# EAGLE board Glasses (EAGLE 7.7.0), part 1 of 2
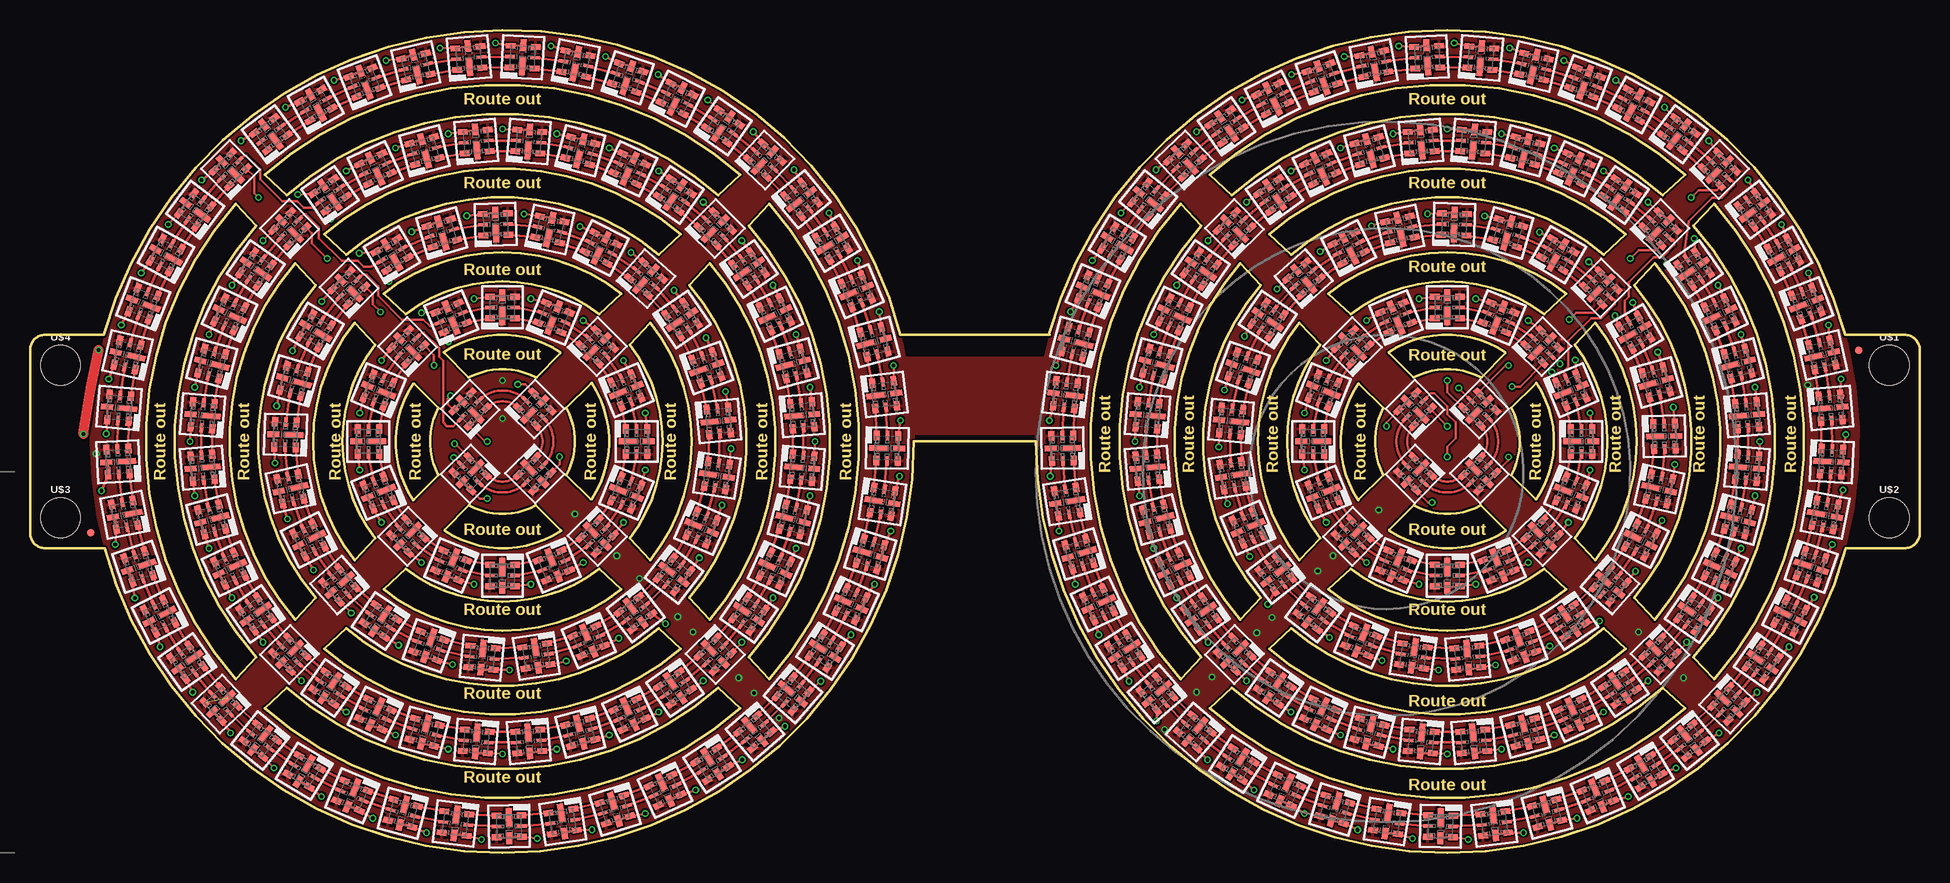
[diagram p0: board, top side]
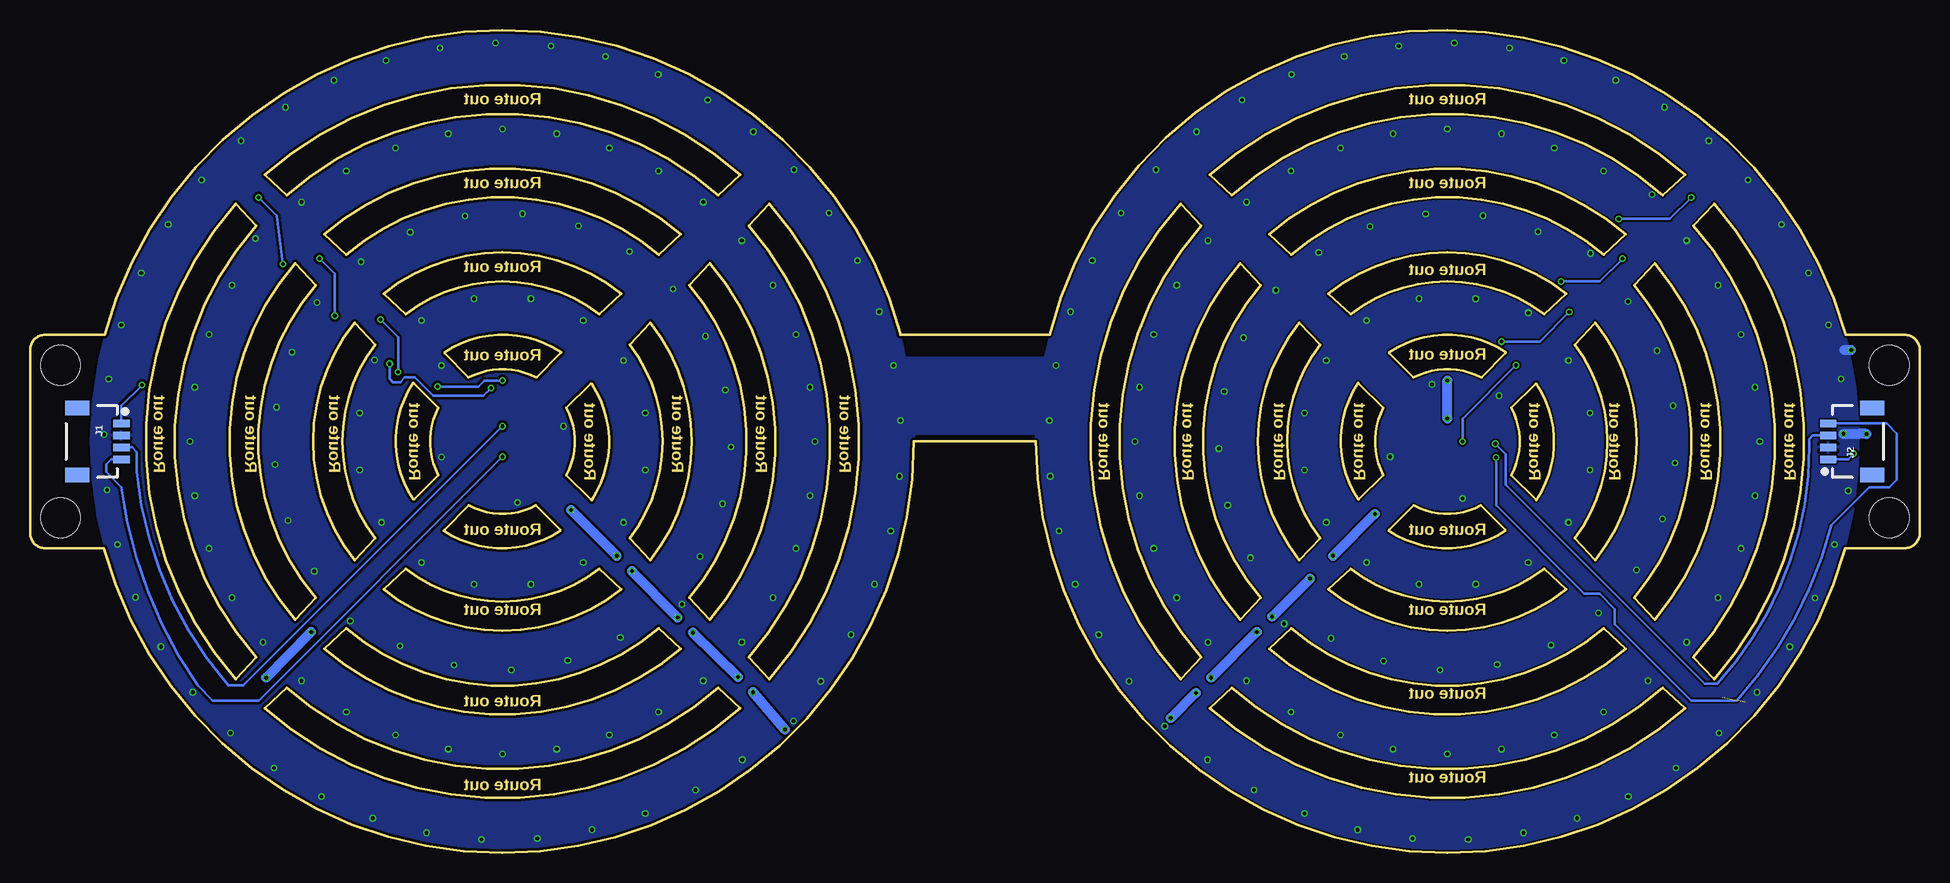
[diagram p1: board, bottom side, seen from below]

Size 157.48 x 68.58 mm. Coordinates in mm from the lower left corner, seen from the top.
Outline: 46.74,39.12 44.7,37.08 arc-56 44.7,31.5 46.74,29.46
Outline: 44.2,41.66 42.23,39.62 42.16,39.62 arc56 36.58,39.62 36.51,39.62 34.54,41.66
Outline: 44.2,26.92 42.16,28.96 arc-56 36.58,28.96 34.54,26.92
Outline: 34.48,41.72 arc-67 44.2,41.72
Outline: 31.94,29.4 arc-67 31.94,39.12
Outline: 44.26,26.86 arc-67 34.54,26.86
Outline: 46.8,39.18 arc-67 46.8,29.46
Outline: 32,29.46 34.04,31.5 arc-56 34.04,37.08 32,39.12
Outline: 125.48,39.12 123.44,37.08 arc-56 123.44,31.5 125.48,29.46
Outline: 122.94,41.66 120.97,39.62 120.9,39.62 arc56 115.32,39.62 115.25,39.62 113.28,41.66
Outline: 122.94,26.92 120.9,28.96 arc-56 115.32,28.96 113.28,26.92
Outline: 113.22,41.72 arc-67 122.94,41.72
Outline: 110.68,29.4 arc-67 110.68,39.12
Outline: 123,26.86 arc-67 113.28,26.86
Outline: 125.54,39.18 arc-67 125.54,29.46
Outline: 110.74,29.46 112.78,31.5 arc-56 112.78,37.08 110.74,39.12
Outline: 84.9,43.18 72.52,43.18 arc77 39.37,68.58 arc74 6.16,43.18 1.27,43.18 arc90 0,41.91 0,26.67 arc90 1.27,25.4 6.22,25.4 arc75 39.37,0 arc90 73.66,34.29 83.82,34.29 arc90 118.11,0 arc75 151.32,25.4 156.21,25.4 arc90 157.48,26.67 157.48,41.91 arc90 156.21,43.18 151.26,43.18 arc75 118.11,68.58 arc75 84.9,43.18
Outline: 84.9,43.18 84.96,43.18
Outline: 47.43,44.9 49.28,46.61 arc77 29.46,46.61 31.31,44.9 arc-75 47.43,44.9
Outline: 49.98,42.35 51.69,44.2 arc-77 51.69,24.38 49.98,26.23 arc75 49.98,42.35
Outline: 47.43,23.69 49.28,21.97 arc-77 29.46,21.97 31.31,23.69 arc75 47.43,23.69
Outline: 28.77,26.23 27.05,24.38 arc-77 27.05,44.2 28.77,42.35 arc75 28.77,26.23
Outline: 52.39,49.85 54.23,51.56 arc81 24.51,51.56 26.35,49.85 arc-81 52.39,49.85
Outline: 54.93,47.31 56.64,49.15 arc-81 56.64,19.43 54.93,21.27 arc81 54.93,47.31
Outline: 57.34,54.8 59.18,56.52 arc83 19.56,56.52 21.4,54.8 arc-83 57.34,54.8
Outline: 59.88,52.26 61.59,54.1 arc-83 61.59,14.48 59.88,16.32 arc83 59.88,52.26
Outline: 23.81,47.31 22.1,49.15 arc81 22.1,19.43 23.81,21.27 arc-81 23.81,47.31
Outline: 26.35,18.73 24.51,17.02 arc81 54.23,17.02 52.39,18.73 arc-81 26.35,18.73
Outline: 18.86,52.26 17.14,54.1 arc83 17.14,14.48 18.86,16.32 arc-83 18.86,52.26
Outline: 21.4,13.78 19.56,12.06 arc83 59.18,12.06 57.34,13.78 arc-83 21.4,13.78
Outline: 126.17,44.9 128.02,46.61 arc77 108.2,46.61 110.05,44.9 arc-75 126.17,44.9
Outline: 128.72,42.35 130.43,44.2 arc-77 130.43,24.38 128.72,26.23 arc75 128.72,42.35
Outline: 126.17,23.69 128.02,21.97 arc-77 108.2,21.97 110.05,23.69 arc75 126.17,23.69
Outline: 107.5,26.23 105.79,24.38 arc-77 105.79,44.2 107.5,42.35 arc75 107.5,26.23
Outline: 131.13,49.85 132.97,51.56 arc81 103.25,51.56 105.09,49.85 arc-81 131.13,49.85
Outline: 133.67,47.31 135.38,49.15 arc-81 135.38,19.43 133.67,21.27 arc81 133.67,47.31
Outline: 136.08,54.8 137.92,56.52 arc83 98.3,56.52 100.14,54.8 arc-83 136.08,54.8
Outline: 138.62,52.26 140.34,54.1 arc-83 140.34,14.48 138.62,16.32 arc83 138.62,52.26
Outline: 102.55,47.31 100.84,49.15 arc81 100.84,19.43 102.55,21.27 arc-81 102.55,47.31
Outline: 105.09,18.73 103.25,17.02 arc81 132.97,17.02 131.13,18.73 arc-81 105.09,18.73
Outline: 97.6,52.26 95.89,54.1 arc83 95.89,14.48 97.6,16.32 arc-83 97.6,52.26
Outline: 100.14,13.78 98.3,12.06 arc83 137.92,12.06 136.08,13.78 arc-83 100.14,13.78
Copper layers (1*16): Top 0.035mm / dielectric 1.5mm / Bottom 0.035mm
Design rules "SparkFun-2-layer-FAB-LIMIT": minimum track width 4mil, minimum drill 6mil, track to track 4mil, track to pad 4mil, pad to pad 4mil, via to via 4mil, smd to smd 4mil, copper to edge 4mil, drill to drill 4mil, minimum pad ring 5mil, minimum via ring 5mil, stop-mask expansion 4mil, vias tented up to drill 25mil, thermal gap 10mil

## Footprints (pad centres in the part's own frame; a part is rotated, then mirrored left to right if it is on the bottom)
FIDUCIAL-MICRO = smd 0.635 x 0.635: 1 0,0
1X04_1MM_RA = smd 0.6 x 1.35: 1 -1.5,0; 2 -0.5,0; 3 0.5,0; 4 1.5,0 | smd 1.2 x 2: NC1 2.8,-3.675; NC2 -2.8,-3.675
APA102-2020 = smd 0.8 x 0.3: CKI 1.05,0; CKO -1.05,0 | smd 0.8 x 0.5: GND 1.05,0.9; SDI 1.05,-0.9; SDO -1.05,-0.9; VDD -1.05,0.9 | smd 0.5 x 1.5: GNDPAD 0,-0.75 | smd 0.5 x 1: VDDPAD 0,1
STAND-OFF = hole 3.302: 0,0

## Placement (x,y rotation side)
FD1  FIDUCIALUFIDUCIAL  [FIDUCIAL-MICRO]  152.4,41.91 0 top
FD2  FIDUCIALUFIDUCIAL  [FIDUCIAL-MICRO]  5.08,26.67 0 top
J1  [1X04_1MM_RA]  149.86,34.29 270 bottom
J2  [1X04_1MM_RA]  7.62,34.29 90 bottom
U1  APA1022020  [APA102-2020]  36.68,31.6 135 top
U2  APA1022020  [APA102-2020]  42.06,31.6 225 top
U3  APA1022020  [APA102-2020]  42.06,36.98 315 top
U4  APA1022020  [APA102-2020]  36.68,36.98 45 top
U5  APA1022020  [APA102-2020]  31.47,42.19 45 top
U6  APA1022020  [APA102-2020]  29.04,38.57 67.5 top
U7  APA1022020  [APA102-2020]  28.19,34.29 90 top
U8  APA1022020  [APA102-2020]  29.04,30.01 112.5 top
U9  APA1022020  [APA102-2020]  31.47,26.39 135 top
U10  APA1022020  [APA102-2020]  35.09,23.96 157.5 top
U11  APA1022020  [APA102-2020]  39.37,23.11 180 top
U12  APA1022020  [APA102-2020]  43.65,23.96 202.5 top
U13  APA1022020  [APA102-2020]  47.27,26.39 225 top
U14  APA1022020  [APA102-2020]  49.7,30.01 247.5 top
U15  APA1022020  [APA102-2020]  50.55,34.29 270 top
U16  APA1022020  [APA102-2020]  49.7,38.57 292.5 top
U17  APA1022020  [APA102-2020]  47.27,42.19 315 top
U18  APA1022020  [APA102-2020]  43.65,44.62 337.5 top
U19  APA1022020  [APA102-2020]  39.37,45.47 0 top
U20  APA1022020  [APA102-2020]  35.09,44.62 22.5 top
U21  APA1022020  [APA102-2020]  26.57,47.09 45 top
U22  APA1022020  [APA102-2020]  23.79,43.5 59.4 top
U23  APA1022020  [APA102-2020]  21.99,39.34 73.8 top
U24  APA1022020  [APA102-2020]  21.28,34.86 88.2 top
U25  APA1022020  [APA102-2020]  21.71,30.34 102.6 top
U26  APA1022020  [APA102-2020]  23.25,26.07 117 top
U27  APA1022020  [APA102-2020]  25.79,22.32 131.4 top
U28  APA1022020  [APA102-2020]  29.2,19.32 145.8 top
U29  APA1022020  [APA102-2020]  33.24,17.26 160.2 top
U30  APA1022020  [APA102-2020]  37.67,16.27 174.6 top
U31  APA1022020  [APA102-2020]  42.2,16.42 189 top
U32  APA1022020  [APA102-2020]  46.56,17.68 203.4 top
U33  APA1022020  [APA102-2020]  50.46,19.99 217.8 top
U34  APA1022020  [APA102-2020]  53.67,23.2 232.2 top
U35  APA1022020  [APA102-2020]  55.98,27.1 246.6 top
U36  APA1022020  [APA102-2020]  57.24,31.46 261 top
U37  APA1022020  [APA102-2020]  57.39,35.99 275.4 top
U38  APA1022020  [APA102-2020]  56.4,40.42 289.8 top
U39  APA1022020  [APA102-2020]  54.34,44.46 304.2 top
U40  APA1022020  [APA102-2020]  51.34,47.87 318.6 top
U41  APA1022020  [APA102-2020]  47.59,50.41 333 top
U42  APA1022020  [APA102-2020]  43.32,51.95 347.4 top
U43  APA1022020  [APA102-2020]  38.8,52.38 1.8 top
U44  APA1022020  [APA102-2020]  34.32,51.67 16.2 top
U45  APA1022020  [APA102-2020]  30.16,49.87 30.6 top
U46  APA1022020  [APA102-2020]  21.63,52.03 45 top
U47  APA1022020  [APA102-2020]  18.82,48.68 55 top
U48  APA1022020  [APA102-2020]  16.64,44.89 65 top
U49  APA1022020  [APA102-2020]  15.14,40.78 75 top
U50  APA1022020  [APA102-2020]  14.38,36.48 85 top
U51  APA1022020  [APA102-2020]  14.38,32.1 95 top
U52  APA1022020  [APA102-2020]  15.14,27.8 105 top
U53  APA1022020  [APA102-2020]  16.64,23.69 115 top
U54  APA1022020  [APA102-2020]  18.82,19.9 125 top
U55  APA1022020  [APA102-2020]  21.63,16.55 135 top
U56  APA1022020  [APA102-2020]  24.98,13.74 145 top
U57  APA1022020  [APA102-2020]  28.77,11.56 155 top
U58  APA1022020  [APA102-2020]  32.88,10.06 165 top
U59  APA1022020  [APA102-2020]  37.18,9.3 175 top
U60  APA1022020  [APA102-2020]  41.56,9.3 185 top
U61  APA1022020  [APA102-2020]  45.86,10.06 195 top
U62  APA1022020  [APA102-2020]  49.97,11.56 205 top
U63  APA1022020  [APA102-2020]  53.76,13.74 215 top
U64  APA1022020  [APA102-2020]  57.11,16.55 225 top
U65  APA1022020  [APA102-2020]  59.92,19.9 235 top
U66  APA1022020  [APA102-2020]  62.1,23.69 245 top
U67  APA1022020  [APA102-2020]  63.6,27.8 255 top
U68  APA1022020  [APA102-2020]  64.36,32.1 265 top
U69  APA1022020  [APA102-2020]  64.36,36.48 275 top
U70  APA1022020  [APA102-2020]  63.6,40.78 285 top
U71  APA1022020  [APA102-2020]  62.1,44.89 295 top
U72  APA1022020  [APA102-2020]  59.92,48.68 305 top
U73  APA1022020  [APA102-2020]  57.11,52.03 315 top
U74  APA1022020  [APA102-2020]  53.76,54.84 325 top
U75  APA1022020  [APA102-2020]  49.97,57.02 335 top
U76  APA1022020  [APA102-2020]  45.86,58.52 345 top
U77  APA1022020  [APA102-2020]  41.56,59.28 355 top
U78  APA1022020  [APA102-2020]  37.18,59.28 5 top
U79  APA1022020  [APA102-2020]  32.88,58.52 15 top
U80  APA1022020  [APA102-2020]  28.77,57.02 25 top
U81  APA1022020  [APA102-2020]  24.98,54.84 35 top
U82  APA1022020  [APA102-2020]  16.69,56.97 45 top
U83  APA1022020  [APA102-2020]  13.76,53.59 53 top
U84  APA1022020  [APA102-2020]  11.32,49.84 61 top
U85  APA1022020  [APA102-2020]  9.43,45.78 69 top
U86  APA1022020  [APA102-2020]  8.12,41.5 77 top
U87  APA1022020  [APA102-2020]  7.42,37.08 85 top
U88  APA1022020  [APA102-2020]  7.35,32.61 93 top
U89  APA1022020  [APA102-2020]  7.89,28.17 101 top
U90  APA1022020  [APA102-2020]  9.05,23.85 109 top
U91  APA1022020  [APA102-2020]  10.8,19.73 117 top
U92  APA1022020  [APA102-2020]  13.1,15.9 125 top
U93  APA1022020  [APA102-2020]  15.92,12.42 133 top
U94  APA1022020  [APA102-2020]  19.19,9.37 141 top
U95  APA1022020  [APA102-2020]  22.85,6.8 149 top
U96  APA1022020  [APA102-2020]  26.84,4.77 157 top
U97  APA1022020  [APA102-2020]  31.07,3.32 165 top
U98  APA1022020  [APA102-2020]  35.46,2.46 173 top
U99  APA1022020  [APA102-2020]  39.93,2.23 181 top
U100  APA1022020  [APA102-2020]  44.39,2.62 189 top
U101  APA1022020  [APA102-2020]  48.75,3.62 197 top
U102  APA1022020  [APA102-2020]  52.92,5.23 205 top
U103  APA1022020  [APA102-2020]  56.84,7.4 213 top
U104  APA1022020  [APA102-2020]  60.41,10.09 221 top
U105  APA1022020  [APA102-2020]  63.57,13.25 229 top
U106  APA1022020  [APA102-2020]  66.26,16.82 237 top
U107  APA1022020  [APA102-2020]  68.43,20.74 245 top
U108  APA1022020  [APA102-2020]  70.04,24.91 253 top
U109  APA1022020  [APA102-2020]  71.04,29.27 261 top
U110  APA1022020  [APA102-2020]  71.43,33.73 269 top
U111  APA1022020  [APA102-2020]  71.2,38.2 277 top
U112  APA1022020  [APA102-2020]  70.34,42.59 285 top
U113  APA1022020  [APA102-2020]  68.89,46.82 293 top
U114  APA1022020  [APA102-2020]  66.86,50.81 301 top
U115  APA1022020  [APA102-2020]  64.29,54.47 309 top
U116  APA1022020  [APA102-2020]  61.24,57.74 317 top
U117  APA1022020  [APA102-2020]  57.76,60.56 325 top
U118  APA1022020  [APA102-2020]  53.93,62.86 333 top
U119  APA1022020  [APA102-2020]  49.81,64.61 341 top
U120  APA1022020  [APA102-2020]  45.49,65.77 349 top
U121  APA1022020  [APA102-2020]  41.05,66.31 357 top
U122  APA1022020  [APA102-2020]  36.58,66.24 5 top
U123  APA1022020  [APA102-2020]  32.16,65.54 13 top
U124  APA1022020  [APA102-2020]  27.88,64.23 21 top
U125  APA1022020  [APA102-2020]  23.82,62.34 29 top
U126  APA1022020  [APA102-2020]  20.07,59.9 37 top
U127  APA1022020  [APA102-2020]  115.42,36.98 45 top
U128  APA1022020  [APA102-2020]  115.42,31.6 135 top
U129  APA1022020  [APA102-2020]  120.8,31.6 225 top
U130  APA1022020  [APA102-2020]  120.8,36.98 315 top
U131  APA1022020  [APA102-2020]  126.01,42.19 315 top
U132  APA1022020  [APA102-2020]  122.39,44.62 337.5 top
U133  APA1022020  [APA102-2020]  118.11,45.47 0 top
U134  APA1022020  [APA102-2020]  113.83,44.62 22.5 top
U135  APA1022020  [APA102-2020]  110.21,42.19 45 top
U136  APA1022020  [APA102-2020]  107.78,38.57 67.5 top
U137  APA1022020  [APA102-2020]  106.93,34.29 90 top
U138  APA1022020  [APA102-2020]  107.78,30.01 112.5 top
U139  APA1022020  [APA102-2020]  110.21,26.39 135 top
U140  APA1022020  [APA102-2020]  113.83,23.96 157.5 top
U141  APA1022020  [APA102-2020]  118.11,23.11 180 top
U142  APA1022020  [APA102-2020]  122.39,23.96 202.5 top
U143  APA1022020  [APA102-2020]  126.01,26.39 225 top
U144  APA1022020  [APA102-2020]  128.44,30.01 247.5 top
U145  APA1022020  [APA102-2020]  129.29,34.29 270 top
U146  APA1022020  [APA102-2020]  128.44,38.57 292.5 top
U147  APA1022020  [APA102-2020]  130.91,47.09 315 top
U148  APA1022020  [APA102-2020]  127.32,49.87 329.4 top
U149  APA1022020  [APA102-2020]  123.16,51.67 343.8 top
U150  APA1022020  [APA102-2020]  118.68,52.38 358.2 top
U151  APA1022020  [APA102-2020]  114.16,51.95 12.6 top
U152  APA1022020  [APA102-2020]  109.89,50.41 27 top
U153  APA1022020  [APA102-2020]  106.14,47.87 41.4 top
U154  APA1022020  [APA102-2020]  103.14,44.46 55.8 top
U155  APA1022020  [APA102-2020]  101.08,40.42 70.2 top
U156  APA1022020  [APA102-2020]  100.09,35.99 84.6 top
U157  APA1022020  [APA102-2020]  100.24,31.46 99 top
U158  APA1022020  [APA102-2020]  101.5,27.1 113.4 top
U159  APA1022020  [APA102-2020]  103.81,23.2 127.8 top
U160  APA1022020  [APA102-2020]  107.02,19.99 142.2 top
U161  APA1022020  [APA102-2020]  110.92,17.68 156.6 top
U162  APA1022020  [APA102-2020]  115.28,16.42 171 top
U163  APA1022020  [APA102-2020]  119.81,16.27 185.4 top
U164  APA1022020  [APA102-2020]  124.24,17.26 199.8 top
U165  APA1022020  [APA102-2020]  128.28,19.32 214.2 top
U166  APA1022020  [APA102-2020]  131.69,22.32 228.6 top
U167  APA1022020  [APA102-2020]  134.23,26.07 243 top
U168  APA1022020  [APA102-2020]  135.77,30.34 257.4 top
U169  APA1022020  [APA102-2020]  136.2,34.73 271.4 top
U170  APA1022020  [APA102-2020]  135.52,39.22 285.8 top
U171  APA1022020  [APA102-2020]  133.75,43.39 300.2 top
U172  APA1022020  [APA102-2020]  135.85,52.03 315 top
U173  APA1022020  [APA102-2020]  132.5,54.84 325 top
U174  APA1022020  [APA102-2020]  128.71,57.02 335 top
U175  APA1022020  [APA102-2020]  124.6,58.52 345 top
U176  APA1022020  [APA102-2020]  120.3,59.28 355 top
U177  APA1022020  [APA102-2020]  115.92,59.28 5 top
U178  APA1022020  [APA102-2020]  111.62,58.52 15 top
U179  APA1022020  [APA102-2020]  107.51,57.02 25 top
U180  APA1022020  [APA102-2020]  103.72,54.84 35 top
U181  APA1022020  [APA102-2020]  100.37,52.03 45 top
U182  APA1022020  [APA102-2020]  97.56,48.68 55 top
U183  APA1022020  [APA102-2020]  95.38,44.89 65 top
U184  APA1022020  [APA102-2020]  93.88,40.78 75 top
U185  APA1022020  [APA102-2020]  93.12,36.48 85 top
U186  APA1022020  [APA102-2020]  93.12,32.1 95 top
U187  APA1022020  [APA102-2020]  93.88,27.8 105 top
U188  APA1022020  [APA102-2020]  95.38,23.69 115 top
U189  APA1022020  [APA102-2020]  97.56,19.9 125 top
U190  APA1022020  [APA102-2020]  100.37,16.55 135 top
U191  APA1022020  [APA102-2020]  103.72,13.74 145 top
U192  APA1022020  [APA102-2020]  107.51,11.56 155 top
U193  APA1022020  [APA102-2020]  111.62,10.06 165 top
U194  APA1022020  [APA102-2020]  115.92,9.3 175 top
U195  APA1022020  [APA102-2020]  120.3,9.3 185 top
U196  APA1022020  [APA102-2020]  124.6,10.06 195 top
U197  APA1022020  [APA102-2020]  128.71,11.56 205 top
U198  APA1022020  [APA102-2020]  132.5,13.74 215 top
U199  APA1022020  [APA102-2020]  135.85,16.55 225 top
U200  APA1022020  [APA102-2020]  138.66,19.9 235 top
U201  APA1022020  [APA102-2020]  140.84,23.69 245 top
U202  APA1022020  [APA102-2020]  142.34,27.8 255 top
U203  APA1022020  [APA102-2020]  143.1,32.1 265 top
U204  APA1022020  [APA102-2020]  143.1,36.48 275 top
U205  APA1022020  [APA102-2020]  142.34,40.78 285 top
U206  APA1022020  [APA102-2020]  140.84,44.89 295 top
U207  APA1022020  [APA102-2020]  138.66,48.68 305 top
U208  APA1022020  [APA102-2020]  140.79,56.97 315 top
U209  APA1022020  [APA102-2020]  137.41,59.9 323 top
U210  APA1022020  [APA102-2020]  133.66,62.34 331 top
U211  APA1022020  [APA102-2020]  129.6,64.23 339 top
U212  APA1022020  [APA102-2020]  125.32,65.54 347 top
U213  APA1022020  [APA102-2020]  120.9,66.24 355 top
U214  APA1022020  [APA102-2020]  116.43,66.31 3 top
U215  APA1022020  [APA102-2020]  111.99,65.77 11 top
U216  APA1022020  [APA102-2020]  107.67,64.61 19 top
U217  APA1022020  [APA102-2020]  103.55,62.86 27 top
U218  APA1022020  [APA102-2020]  99.72,60.56 35 top
U219  APA1022020  [APA102-2020]  96.24,57.74 43 top
U220  APA1022020  [APA102-2020]  93.19,54.47 51 top
U221  APA1022020  [APA102-2020]  90.62,50.81 59 top
U222  APA1022020  [APA102-2020]  88.59,46.82 67 top
U223  APA1022020  [APA102-2020]  87.14,42.59 75 top
U224  APA1022020  [APA102-2020]  86.28,38.2 83 top
U225  APA1022020  [APA102-2020]  86.05,33.73 91 top
U226  APA1022020  [APA102-2020]  86.44,29.27 99 top
U227  APA1022020  [APA102-2020]  87.44,24.91 107 top
U228  APA1022020  [APA102-2020]  89.05,20.74 115 top
U229  APA1022020  [APA102-2020]  91.22,16.82 123 top
U230  APA1022020  [APA102-2020]  93.91,13.25 131 top
U231  APA1022020  [APA102-2020]  97.07,10.09 139 top
U232  APA1022020  [APA102-2020]  100.64,7.4 147 top
U233  APA1022020  [APA102-2020]  104.56,5.23 155 top
U234  APA1022020  [APA102-2020]  108.73,3.62 163 top
U235  APA1022020  [APA102-2020]  113.09,2.62 171 top
U236  APA1022020  [APA102-2020]  117.55,2.23 179 top
U237  APA1022020  [APA102-2020]  122.02,2.46 187 top
U238  APA1022020  [APA102-2020]  126.41,3.32 195 top
U239  APA1022020  [APA102-2020]  130.64,4.77 203 top
U240  APA1022020  [APA102-2020]  134.63,6.8 211 top
U241  APA1022020  [APA102-2020]  138.29,9.37 219 top
U242  APA1022020  [APA102-2020]  141.56,12.42 227 top
U243  APA1022020  [APA102-2020]  144.38,15.9 235 top
U244  APA1022020  [APA102-2020]  146.68,19.73 243 top
U245  APA1022020  [APA102-2020]  148.43,23.85 251 top
U246  APA1022020  [APA102-2020]  149.59,28.17 259 top
U247  APA1022020  [APA102-2020]  150.13,32.61 267 top
U248  APA1022020  [APA102-2020]  150.06,37.08 275 top
U249  APA1022020  [APA102-2020]  149.36,41.5 283 top
U250  APA1022020  [APA102-2020]  148.05,45.78 291 top
U251  APA1022020  [APA102-2020]  146.16,49.84 299 top
U252  APA1022020  [APA102-2020]  143.72,53.59 307 top
U$1  [STAND-OFF]  154.94,40.64 0 top
U$2  [STAND-OFF]  154.94,27.94 0 top
U$3  [STAND-OFF]  2.54,27.94 0 top
U$4  [STAND-OFF]  2.54,40.64 0 top

## Library data of the parts
FD1 FD2 = SparkFun-Aesthetics
J1 J2 = SparkFun-Connectors; PROD_ID: CONN-13694
U1-U252 = 1_BES_Optoelectronics
U$1-U$4 = SparkFun-Hardware

## Nets
CK1: U28.CKO U29.CKI
CK2: U56.CKO U57.CKI
CK3: U84.CKO U85.CKI
CK4: U112.CKO U113.CKI
CK5: U140.CKO U141.CKI
CK6: U168.CKO U169.CKI
CK7: U196.CKO U197.CKI
CK8: U224.CKO U225.CKI
GND: J1.1 J2.1 U1.GND U1.GNDPAD U2.GND U2.GNDPAD U3.GND U3.GNDPAD U4.GND U4.GNDPAD U5.GND U5.GNDPAD U6.GND U6.GNDPAD U7.GND U7.GNDPAD U8.GND U8.GNDPAD U9.GND U9.GNDPAD U10.GND U10.GNDPAD U11.GND U11.GNDPAD U12.GND U12.GNDPAD U13.GND U13.GNDPAD U14.GND U14.GNDPAD U15.GND U15.GNDPAD U16.GND U16.GNDPAD U17.GND U17.GNDPAD U18.GND U18.GNDPAD U19.GND U19.GNDPAD U20.GND U20.GNDPAD U21.GND U21.GNDPAD U22.GND U22.GNDPAD U23.GND U23.GNDPAD U24.GND U24.GNDPAD U25.GND U25.GNDPAD U26.GND U26.GNDPAD U27.GND U27.GNDPAD U28.GND U28.GNDPAD U29.GND U29.GNDPAD U30.GND U30.GNDPAD U31.GND U31.GNDPAD U32.GND U32.GNDPAD U33.GND U33.GNDPAD U34.GND U34.GNDPAD U35.GND U35.GNDPAD U36.GND U36.GNDPAD U37.GND U37.GNDPAD U38.GND U38.GNDPAD U39.GND U39.GNDPAD U40.GND U40.GNDPAD U41.GND U41.GNDPAD U42.GND U42.GNDPAD U43.GND U43.GNDPAD U44.GND U44.GNDPAD U45.GND U45.GNDPAD U46.GND U46.GNDPAD U47.GND U47.GNDPAD U48.GND U48.GNDPAD U49.GND U49.GNDPAD U50.GND U50.GNDPAD U51.GND U51.GNDPAD U52.GND U52.GNDPAD U53.GND U53.GNDPAD U54.GND U54.GNDPAD U55.GND U55.GNDPAD U56.GND U56.GNDPAD U57.GND U57.GNDPAD U58.GND U58.GNDPAD U59.GND U59.GNDPAD U60.GND U60.GNDPAD U61.GND U61.GNDPAD U62.GND U62.GNDPAD U63.GND U63.GNDPAD U64.GND U64.GNDPAD U65.GND U65.GNDPAD U66.GND U66.GNDPAD U67.GND U67.GNDPAD U68.GND U68.GNDPAD U69.GND U69.GNDPAD U70.GND U70.GNDPAD U71.GND U71.GNDPAD U72.GND U72.GNDPAD U73.GND U73.GNDPAD U74.GND U74.GNDPAD U75.GND U75.GNDPAD U76.GND U76.GNDPAD U77.GND U77.GNDPAD U78.GND U78.GNDPAD U79.GND U79.GNDPAD U80.GND U80.GNDPAD U81.GND U81.GNDPAD U82.GND U82.GNDPAD U83.GND U83.GNDPAD U84.GND U84.GNDPAD U85.GND U85.GNDPAD U86.GND U86.GNDPAD U87.GND U87.GNDPAD U88.GND U88.GNDPAD U89.GND U89.GNDPAD U90.GND U90.GNDPAD U91.GND U91.GNDPAD U92.GND U92.GNDPAD U93.GND U93.GNDPAD U94.GND U94.GNDPAD U95.GND U95.GNDPAD U96.GND U96.GNDPAD U97.GND U97.GNDPAD U98.GND U98.GNDPAD U99.GND U99.GNDPAD U100.GND U100.GNDPAD U101.GND U101.GNDPAD U102.GND U102.GNDPAD U103.GND U103.GNDPAD U104.GND U104.GNDPAD U105.GND U105.GNDPAD U106.GND U106.GNDPAD U107.GND U107.GNDPAD U108.GND U108.GNDPAD U109.GND U109.GNDPAD U110.GND U110.GNDPAD U111.GND U111.GNDPAD U112.GND U112.GNDPAD U113.GND U113.GNDPAD U114.GND U114.GNDPAD U115.GND U115.GNDPAD U116.GND U116.GNDPAD U117.GND U117.GNDPAD U118.GND U118.GNDPAD U119.GND U119.GNDPAD U120.GND U120.GNDPAD U121.GND U121.GNDPAD U122.GND U122.GNDPAD U123.GND U123.GNDPAD U124.GND U124.GNDPAD U125.GND U125.GNDPAD U126.GND U126.GNDPAD U127.GND U127.GNDPAD U128.GND U128.GNDPAD U129.GND U129.GNDPAD U130.GND U130.GNDPAD U131.GND U131.GNDPAD U132.GND U132.GNDPAD U133.GND U133.GNDPAD U134.GND U134.GNDPAD U135.GND U135.GNDPAD U136.GND U136.GNDPAD U137.GND U137.GNDPAD U138.GND U138.GNDPAD U139.GND U139.GNDPAD U140.GND U140.GNDPAD U141.GND U141.GNDPAD U142.GND U142.GNDPAD U143.GND U143.GNDPAD U144.GND U144.GNDPAD U145.GND U145.GNDPAD U146.GND U146.GNDPAD U147.GND U147.GNDPAD U148.GND U148.GNDPAD U149.GND U149.GNDPAD U150.GND U150.GNDPAD U151.GND U151.GNDPAD U152.GND U152.GNDPAD U153.GND U153.GNDPAD U154.GND U154.GNDPAD U155.GND U155.GNDPAD U156.GND U156.GNDPAD U157.GND U157.GNDPAD U158.GND U158.GNDPAD U159.GND U159.GNDPAD U160.GND U160.GNDPAD U161.GND U161.GNDPAD U162.GND U162.GNDPAD U163.GND U163.GNDPAD U164.GND U164.GNDPAD U165.GND U165.GNDPAD U166.GND U166.GNDPAD U167.GND U167.GNDPAD U168.GND U168.GNDPAD U169.GND U169.GNDPAD U170.GND U170.GNDPAD U171.GND U171.GNDPAD U172.GND U172.GNDPAD U173.GND U173.GNDPAD U174.GND U174.GNDPAD U175.GND U175.GNDPAD U176.GND U176.GNDPAD U177.GND U177.GNDPAD U178.GND U178.GNDPAD U179.GND U179.GNDPAD U180.GND U180.GNDPAD U181.GND U181.GNDPAD U182.GND U182.GNDPAD U183.GND U183.GNDPAD U184.GND U184.GNDPAD U185.GND U185.GNDPAD U186.GND U186.GNDPAD U187.GND U187.GNDPAD U188.GND U188.GNDPAD U189.GND U189.GNDPAD U190.GND U190.GNDPAD U191.GND U191.GNDPAD U192.GND U192.GNDPAD U193.GND U193.GNDPAD U194.GND U194.GNDPAD U195.GND U195.GNDPAD U196.GND U196.GNDPAD U197.GND U197.GNDPAD U198.GND U198.GNDPAD U199.GND U199.GNDPAD U200.GND U200.GNDPAD U201.GND U201.GNDPAD U202.GND U202.GNDPAD U203.GND U203.GNDPAD U204.GND U204.GNDPAD U205.GND U205.GNDPAD U206.GND U206.GNDPAD U207.GND U207.GNDPAD U208.GND U208.GNDPAD U209.GND U209.GNDPAD U210.GND U210.GNDPAD U211.GND U211.GNDPAD U212.GND U212.GNDPAD U213.GND U213.GNDPAD U214.GND U214.GNDPAD U215.GND U215.GNDPAD U216.GND U216.GNDPAD U217.GND U217.GNDPAD U218.GND U218.GNDPAD U219.GND U219.GNDPAD U220.GND U220.GNDPAD U221.GND U221.GNDPAD U222.GND U222.GNDPAD U223.GND U223.GNDPAD U224.GND U224.GNDPAD U225.GND U225.GNDPAD U226.GND U226.GNDPAD U227.GND U227.GNDPAD U228.GND U228.GNDPAD U229.GND U229.GNDPAD U230.GND U230.GNDPAD U231.GND U231.GNDPAD U232.GND U232.GNDPAD U233.GND U233.GNDPAD U234.GND U234.GNDPAD U235.GND U235.GNDPAD U236.GND U236.GNDPAD U237.GND U237.GNDPAD U238.GND U238.GNDPAD U239.GND U239.GNDPAD U240.GND U240.GNDPAD U241.GND U241.GNDPAD U242.GND U242.GNDPAD U243.GND U243.GNDPAD U244.GND U244.GNDPAD U245.GND U245.GNDPAD U246.GND U246.GNDPAD U247.GND U247.GNDPAD U248.GND U248.GNDPAD U249.GND U249.GNDPAD U250.GND U250.GNDPAD U251.GND U251.GNDPAD U252.GND U252.GNDPAD
N$1: U1.SDO U2.SDI
N$2: U1.CKO U2.CKI
N$3: U2.CKO U3.CKI
N$4: U2.SDO U3.SDI
N$5: U3.SDO U4.SDI
N$6: U3.CKO U4.CKI
N$7: U4.CKO U5.CKI
N$8: U4.SDO U5.SDI
N$9: U5.CKO U6.CKI
N$10: U5.SDO U6.SDI
N$11: U6.CKO U7.CKI
N$12: U6.SDO U7.SDI
N$13: U8.SDO U9.SDI
N$14: U8.CKO U9.CKI
N$15: U9.CKO U10.CKI
N$16: U9.SDO U10.SDI
N$17: U10.SDO U11.SDI
N$18: U10.CKO U11.CKI
N$19: U11.CKO U12.CKI
N$20: U11.SDO U12.SDI
N$21: U12.CKO U13.CKI
N$22: U12.SDO U13.SDI
N$23: U13.CKO U14.CKI
N$24: U13.SDO U14.SDI
N$25: U7.SDO U8.SDI
N$26: U7.CKO U8.CKI
N$27: U15.SDO U16.SDI
N$28: U15.CKO U16.CKI
N$29: U16.CKO U17.CKI
N$30: U16.SDO U17.SDI
N$31: U17.SDO U18.SDI
N$32: U17.CKO U18.CKI
N$33: U18.CKO U19.CKI
N$34: U18.SDO U19.SDI
N$35: U19.CKO U20.CKI
N$36: U19.SDO U20.SDI
N$37: U20.CKO U21.CKI
N$38: U20.SDO U21.SDI
N$39: U22.SDO U23.SDI
N$40: U22.CKO U23.CKI
N$41: U23.CKO U24.CKI
N$42: U23.SDO U24.SDI
N$43: U24.SDO U25.SDI
N$44: U24.CKO U25.CKI
N$45: U25.CKO U26.CKI
N$46: U25.SDO U26.SDI
N$47: U26.CKO U27.CKI
N$48: U26.SDO U27.SDI
N$49: U27.CKO U28.CKI
N$50: U27.SDO U28.SDI
N$51: U21.SDO U22.SDI
N$52: U21.CKO U22.CKI
N$53: U14.SDO U15.SDI
N$54: U14.CKO U15.CKI
N$55: U29.SDO U30.SDI
N$56: U29.CKO U30.CKI
N$57: U30.CKO U31.CKI
N$58: U30.SDO U31.SDI
N$59: U31.SDO U32.SDI
N$60: U31.CKO U32.CKI
N$61: U32.CKO U33.CKI
N$62: U32.SDO U33.SDI
N$63: U33.CKO U34.CKI
N$64: U33.SDO U34.SDI
N$65: U34.CKO U35.CKI
N$66: U34.SDO U35.SDI
N$67: U36.SDO U37.SDI
N$68: U36.CKO U37.CKI
N$69: U37.CKO U38.CKI
N$70: U37.SDO U38.SDI
N$71: U38.SDO U39.SDI
N$72: U38.CKO U39.CKI
N$73: U39.CKO U40.CKI
N$74: U39.SDO U40.SDI
N$75: U40.CKO U41.CKI
N$76: U40.SDO U41.SDI
N$77: U41.CKO U42.CKI
N$78: U41.SDO U42.SDI
N$79: U35.SDO U36.SDI
N$80: U35.CKO U36.CKI
N$81: U43.SDO U44.SDI
N$82: U43.CKO U44.CKI
N$83: U44.CKO U45.CKI
N$84: U44.SDO U45.SDI
N$85: U45.SDO U46.SDI
N$86: U45.CKO U46.CKI
N$87: U46.CKO U47.CKI
N$88: U46.SDO U47.SDI
N$89: U47.CKO U48.CKI
N$90: U47.SDO U48.SDI
N$91: U48.CKO U49.CKI
N$92: U48.SDO U49.SDI
N$93: U50.SDO U51.SDI
N$94: U50.CKO U51.CKI
N$95: U51.CKO U52.CKI
N$96: U51.SDO U52.SDI
N$97: U52.SDO U53.SDI
N$98: U52.CKO U53.CKI
N$99: U53.CKO U54.CKI
N$100: U53.SDO U54.SDI
N$101: U54.CKO U55.CKI
N$102: U54.SDO U55.SDI
N$103: U55.CKO U56.CKI
N$104: U55.SDO U56.SDI
N$105: U49.SDO U50.SDI
N$106: U49.CKO U50.CKI
N$107: U42.SDO U43.SDI
N$108: U42.CKO U43.CKI
N$109: U57.SDO U58.SDI
N$110: U57.CKO U58.CKI
N$111: U58.CKO U59.CKI
N$112: U58.SDO U59.SDI
N$113: U59.SDO U60.SDI
N$114: U59.CKO U60.CKI
N$115: U60.CKO U61.CKI
N$116: U60.SDO U61.SDI
N$117: U61.CKO U62.CKI
N$118: U61.SDO U62.SDI
N$119: U62.CKO U63.CKI
N$120: U62.SDO U63.SDI
N$121: U64.SDO U65.SDI
N$122: U64.CKO U65.CKI
N$123: U65.CKO U66.CKI
N$124: U65.SDO U66.SDI
N$125: U66.SDO U67.SDI
N$126: U66.CKO U67.CKI
N$127: U67.CKO U68.CKI
N$128: U67.SDO U68.SDI
N$129: U68.CKO U69.CKI
N$130: U68.SDO U69.SDI
N$131: U69.CKO U70.CKI
N$132: U69.SDO U70.SDI
N$133: U63.SDO U64.SDI
N$134: U63.CKO U64.CKI
N$135: U71.SDO U72.SDI
N$136: U71.CKO U72.CKI
N$137: U72.CKO U73.CKI
N$138: U72.SDO U73.SDI
N$139: U73.SDO U74.SDI
N$140: U73.CKO U74.CKI
N$141: U74.CKO U75.CKI
N$142: U74.SDO U75.SDI
N$143: U75.CKO U76.CKI
N$144: U75.SDO U76.SDI
N$145: U76.CKO U77.CKI
N$146: U76.SDO U77.SDI
N$147: U78.SDO U79.SDI
N$148: U78.CKO U79.CKI
N$149: U79.CKO U80.CKI
N$150: U79.SDO U80.SDI
N$151: U80.SDO U81.SDI
N$152: U80.CKO U81.CKI
N$153: U81.CKO U82.CKI
N$154: U81.SDO U82.SDI
N$155: U82.CKO U83.CKI
N$156: U82.SDO U83.SDI
N$157: U83.CKO U84.CKI
N$158: U83.SDO U84.SDI
N$159: U77.SDO U78.SDI
N$160: U77.CKO U78.CKI
N$161: U70.SDO U71.SDI
N$162: U70.CKO U71.CKI
N$163: U85.SDO U86.SDI
N$164: U85.CKO U86.CKI
N$165: U86.CKO U87.CKI
N$166: U86.SDO U87.SDI
N$167: U87.SDO U88.SDI
N$168: U87.CKO U88.CKI
N$169: U88.CKO U89.CKI
N$170: U88.SDO U89.SDI
N$171: U89.CKO U90.CKI
N$172: U89.SDO U90.SDI
N$173: U90.CKO U91.CKI
N$174: U90.SDO U91.SDI
N$175: U92.SDO U93.SDI
N$176: U92.CKO U93.CKI
N$177: U93.CKO U94.CKI
N$178: U93.SDO U94.SDI
N$179: U94.SDO U95.SDI
N$180: U94.CKO U95.CKI
N$181: U95.SDO U96.SDI
N$182: U95.CKO U96.CKI
N$183: U96.CKO U97.CKI
N$184: U96.SDO U97.SDI
N$185: U97.CKO U98.CKI
N$186: U97.SDO U98.SDI
N$187: U91.SDO U92.SDI
N$188: U91.CKO U92.CKI
N$189: U99.SDO U100.SDI
N$190: U99.CKO U100.CKI
N$191: U100.CKO U101.CKI
N$192: U100.SDO U101.SDI
N$193: U101.SDO U102.SDI
N$194: U101.CKO U102.CKI
N$195: U102.CKO U103.CKI
N$196: U102.SDO U103.SDI
N$197: U103.CKO U104.CKI
N$198: U103.SDO U104.SDI
N$199: U104.CKO U105.CKI
N$200: U104.SDO U105.SDI
N$201: U106.SDO U107.SDI
N$202: U106.CKO U107.CKI
N$203: U107.CKO U108.CKI
N$204: U107.SDO U108.SDI
N$205: U108.SDO U109.SDI
N$206: U108.CKO U109.CKI
N$207: U109.CKO U110.CKI
N$208: U109.SDO U110.SDI
N$209: U110.CKO U111.CKI
N$210: U110.SDO U111.SDI
N$211: U111.CKO U112.CKI
N$212: U111.SDO U112.SDI
N$213: U105.SDO U106.SDI
N$214: U105.CKO U106.CKI
N$215: U98.SDO U99.SDI
N$216: U98.CKO U99.CKI
N$217: U113.SDO U114.SDI
N$218: U113.CKO U114.CKI
N$219: U114.CKO U115.CKI
N$220: U114.SDO U115.SDI
N$221: U115.SDO U116.SDI
N$222: U115.CKO U116.CKI
N$223: U116.CKO U117.CKI
N$224: U116.SDO U117.SDI
N$225: U117.CKO U118.CKI
N$226: U117.SDO U118.SDI
N$227: U118.CKO U119.CKI
N$228: U118.SDO U119.SDI
N$229: U120.SDO U121.SDI
N$230: U120.CKO U121.CKI
N$231: U121.CKO U122.CKI
N$232: U121.SDO U122.SDI
N$233: U122.SDO U123.SDI
N$234: U122.CKO U123.CKI
N$235: U123.CKO U124.CKI
N$236: U123.SDO U124.SDI
N$237: U124.CKO U125.CKI
N$238: U124.SDO U125.SDI
N$239: U125.CKO U126.CKI
N$240: U125.SDO U126.SDI
N$241: U119.SDO U120.SDI
N$242: U119.CKO U120.CKI
N$243: U127.SDO U128.SDI
N$244: U127.CKO U128.CKI
N$245: U128.CKO U129.CKI
N$246: U128.SDO U129.SDI
N$247: U129.SDO U130.SDI
N$248: U129.CKO U130.CKI
N$249: U130.CKO U131.CKI
N$250: U130.SDO U131.SDI
N$251: U131.CKO U132.CKI
N$252: U131.SDO U132.SDI
N$253: U132.CKO U133.CKI
N$254: U132.SDO U133.SDI
N$255: U134.SDO U135.SDI
N$256: U134.CKO U135.CKI
N$257: U135.CKO U136.CKI
N$258: U135.SDO U136.SDI
N$259: U136.SDO U137.SDI
N$260: U136.CKO U137.CKI
N$261: U137.CKO U138.CKI
N$262: U137.SDO U138.SDI
N$263: U138.CKO U139.CKI
N$264: U138.SDO U139.SDI
N$265: U139.CKO U140.CKI
N$266: U139.SDO U140.SDI
N$267: U133.SDO U134.SDI
N$268: U133.CKO U134.CKI
N$269: J1.3 U127.SDI
N$270: J2.3 U1.SDI
N$271: U141.SDO U142.SDI
N$272: U141.CKO U142.CKI
N$273: U142.CKO U143.CKI
N$274: U142.SDO U143.SDI
N$275: U143.SDO U144.SDI
N$276: U143.CKO U144.CKI
N$277: U144.CKO U145.CKI
N$278: U144.SDO U145.SDI
N$279: U145.CKO U146.CKI
N$280: U145.SDO U146.SDI
N$281: U146.CKO U147.CKI
N$282: U146.SDO U147.SDI
N$283: U148.SDO U149.SDI
N$284: U148.CKO U149.CKI
N$285: U149.CKO U150.CKI
N$286: U149.SDO U150.SDI
N$287: U150.SDO U151.SDI
N$288: U150.CKO U151.CKI
N$289: U151.CKO U152.CKI
N$290: U151.SDO U152.SDI
N$291: U152.CKO U153.CKI
N$292: U152.SDO U153.SDI
N$293: U153.CKO U154.CKI
N$294: U153.SDO U154.SDI
N$295: U147.SDO U148.SDI
N$296: U147.CKO U148.CKI
N$297: U155.SDO U156.SDI
N$298: U155.CKO U156.CKI
N$299: U156.CKO U157.CKI
N$300: U156.SDO U157.SDI
N$301: U157.SDO U158.SDI
N$302: U157.CKO U158.CKI
N$303: U158.CKO U159.CKI
N$304: U158.SDO U159.SDI
N$305: U159.CKO U160.CKI
N$306: U159.SDO U160.SDI
N$307: U160.CKO U161.CKI
N$308: U160.SDO U161.SDI
N$309: U162.SDO U163.SDI
N$310: U162.CKO U163.CKI
N$311: U163.CKO U164.CKI
N$312: U163.SDO U164.SDI
N$313: U164.SDO U165.SDI
N$314: U164.CKO U165.CKI
N$315: U165.CKO U166.CKI
N$316: U165.SDO U166.SDI
N$317: U166.CKO U167.CKI
N$318: U166.SDO U167.SDI
N$319: U167.CKO U168.CKI
N$320: U167.SDO U168.SDI
N$321: U161.SDO U162.SDI
N$322: U161.CKO U162.CKI
N$323: U154.SDO U155.SDI
N$324: U154.CKO U155.CKI
N$325: U169.SDO U170.SDI
N$326: U169.CKO U170.CKI
N$327: U170.CKO U171.CKI
N$328: U170.SDO U171.SDI
N$329: U171.SDO U172.SDI
N$330: U171.CKO U172.CKI
N$331: U172.CKO U173.CKI
N$332: U172.SDO U173.SDI
N$333: U173.CKO U174.CKI
N$334: U173.SDO U174.SDI
N$335: U174.CKO U175.CKI
N$336: U174.SDO U175.SDI
N$337: U176.SDO U177.SDI
N$338: U176.CKO U177.CKI
N$339: U177.CKO U178.CKI
N$340: U177.SDO U178.SDI
N$341: U178.SDO U179.SDI
N$342: U178.CKO U179.CKI
N$343: U179.CKO U180.CKI
N$344: U179.SDO U180.SDI
N$345: U180.CKO U181.CKI
N$346: U180.SDO U181.SDI
N$347: U181.CKO U182.CKI
N$348: U181.SDO U182.SDI
N$349: U175.SDO U176.SDI
N$350: U175.CKO U176.CKI
N$351: U183.SDO U184.SDI
N$352: U183.CKO U184.CKI
N$353: U184.CKO U185.CKI
N$354: U184.SDO U185.SDI
N$355: U185.SDO U186.SDI
N$356: U185.CKO U186.CKI
N$357: U186.CKO U187.CKI
N$358: U186.SDO U187.SDI
N$359: U187.CKO U188.CKI
N$360: U187.SDO U188.SDI
N$361: U188.CKO U189.CKI
N$362: U188.SDO U189.SDI
N$365: U190.SDO U191.SDI
N$366: U190.CKO U191.CKI
N$367: U191.CKO U192.CKI
N$368: U191.SDO U192.SDI
N$369: U192.SDO U193.SDI
N$370: U192.CKO U193.CKI
N$371: U193.CKO U194.CKI
N$372: U193.SDO U194.SDI
N$373: U194.CKO U195.CKI
N$374: U194.SDO U195.SDI
N$375: U189.SDO U190.SDI
N$376: U189.CKO U190.CKI
N$377: U182.SDO U183.SDI
N$378: U182.CKO U183.CKI
N$379: U195.CKO U196.CKI
N$380: U195.SDO U196.SDI
N$381: U197.SDO U198.SDI
N$382: U197.CKO U198.CKI
N$383: U198.CKO U199.CKI
N$384: U198.SDO U199.SDI
N$385: U199.SDO U200.SDI
N$386: U199.CKO U200.CKI
N$387: U200.CKO U201.CKI
N$388: U200.SDO U201.SDI
N$389: U201.CKO U202.CKI
N$390: U201.SDO U202.SDI
N$391: U202.CKO U203.CKI
N$392: U202.SDO U203.SDI
N$393: U204.SDO U205.SDI
N$394: U204.CKO U205.CKI
N$395: U205.CKO U206.CKI
N$396: U205.SDO U206.SDI
N$397: U206.SDO U207.SDI
N$398: U206.CKO U207.CKI
N$399: U207.CKO U208.CKI
N$400: U207.SDO U208.SDI
N$401: U208.CKO U209.CKI
N$402: U208.SDO U209.SDI
N$403: U209.CKO U210.CKI
N$404: U209.SDO U210.SDI
N$405: U203.SDO U204.SDI
N$406: U203.CKO U204.CKI
N$407: U211.SDO U212.SDI
N$408: U211.CKO U212.CKI
N$409: U212.CKO U213.CKI
N$410: U212.SDO U213.SDI
N$411: U213.SDO U214.SDI
N$412: U213.CKO U214.CKI
N$413: U214.CKO U215.CKI
N$414: U214.SDO U215.SDI
N$415: U215.CKO U216.CKI
N$416: U215.SDO U216.SDI
N$417: U216.CKO U217.CKI
N$418: U216.SDO U217.SDI
N$419: U217.SDO U218.SDI
N$420: U217.CKO U218.CKI
N$421: U210.SDO U211.SDI
N$422: U210.CKO U211.CKI
N$423: U218.CKO U219.CKI
N$424: U218.SDO U219.SDI
N$425: U219.CKO U220.CKI
N$426: U219.SDO U220.SDI
N$427: U220.SDO U221.SDI
N$428: U220.CKO U221.CKI
N$429: U221.CKO U222.CKI
N$430: U221.SDO U222.SDI
N$431: U222.CKO U223.CKI
N$432: U222.SDO U223.SDI
N$433: U223.CKO U224.CKI
N$434: U223.SDO U224.SDI
N$435: U225.SDO U226.SDI
N$436: U225.CKO U226.CKI
N$437: U226.CKO U227.CKI
N$438: U226.SDO U227.SDI
N$439: U227.SDO U228.SDI
N$440: U227.CKO U228.CKI
N$441: U228.CKO U229.CKI
N$442: U228.SDO U229.SDI
N$443: U229.CKO U230.CKI
N$444: U229.SDO U230.SDI
N$445: U230.CKO U231.CKI
N$446: U230.SDO U231.SDI
N$447: U232.SDO U233.SDI
N$448: U232.CKO U233.CKI
N$449: U233.CKO U234.CKI
N$450: U233.SDO U234.SDI
N$451: U234.SDO U235.SDI
N$452: U234.CKO U235.CKI
N$453: U235.CKO U236.CKI
N$454: U235.SDO U236.SDI
N$455: U236.CKO U237.CKI
N$456: U236.SDO U237.SDI
N$457: U237.CKO U238.CKI
N$458: U237.SDO U238.SDI
N$459: U231.SDO U232.SDI
N$460: U231.CKO U232.CKI
N$461: U239.SDO U240.SDI
N$462: U239.CKO U240.CKI
N$463: U240.CKO U241.CKI
N$464: U240.SDO U241.SDI
N$465: U241.SDO U242.SDI
N$466: U241.CKO U242.CKI
N$467: U242.CKO U243.CKI
N$468: U242.SDO U243.SDI
N$469: U243.CKO U244.CKI
N$470: U243.SDO U244.SDI
N$471: U244.CKO U245.CKI
N$472: U244.SDO U245.SDI
N$473: U245.SDO U246.SDI
N$474: U245.CKO U246.CKI
N$475: U238.SDO U239.SDI
N$476: U238.CKO U239.CKI
N$477: U246.CKO U247.CKI
N$478: U246.SDO U247.SDI
N$479: U247.CKO U248.CKI
N$480: U247.SDO U248.SDI
N$481: U248.SDO U249.SDI
N$482: U248.CKO U249.CKI
N$483: U249.CKO U250.CKI
N$484: U249.SDO U250.SDI
N$485: U250.CKO U251.CKI
N$486: U250.SDO U251.SDI
N$487: U251.CKO U252.CKI
N$488: U251.SDO U252.SDI
N$489: J1.4 U127.CKI
N$490: J2.4 U1.CKI
SD1: U28.SDO U29.SDI
SD2: U56.SDO U57.SDI
SD3: U84.SDO U85.SDI
SD4: U112.SDO U113.SDI
SD5: U140.SDO U141.SDI
SD6: U168.SDO U169.SDI
SD7: U196.SDO U197.SDI
SD8: U224.SDO U225.SDI
VCC: J1.2 J2.2 U1.VDD U1.VDDPAD U2.VDD U2.VDDPAD U3.VDD U3.VDDPAD U4.VDD U4.VDDPAD U5.VDD U5.VDDPAD U6.VDD U6.VDDPAD U7.VDD U7.VDDPAD U8.VDD U8.VDDPAD U9.VDD U9.VDDPAD U10.VDD U10.VDDPAD U11.VDD U11.VDDPAD U12.VDD U12.VDDPAD U13.VDD U13.VDDPAD U14.VDD U14.VDDPAD U15.VDD U15.VDDPAD U16.VDD U16.VDDPAD U17.VDD U17.VDDPAD U18.VDD U18.VDDPAD U19.VDD U19.VDDPAD U20.VDD U20.VDDPAD U21.VDD U21.VDDPAD U22.VDD U22.VDDPAD U23.VDD U23.VDDPAD U24.VDD U24.VDDPAD U25.VDD U25.VDDPAD U26.VDD U26.VDDPAD U27.VDD U27.VDDPAD U28.VDD U28.VDDPAD U29.VDD U29.VDDPAD U30.VDD U30.VDDPAD U31.VDD U31.VDDPAD U32.VDD U32.VDDPAD U33.VDD U33.VDDPAD U34.VDD U34.VDDPAD U35.VDD U35.VDDPAD U36.VDD U36.VDDPAD U37.VDD U37.VDDPAD U38.VDD U38.VDDPAD U39.VDD U39.VDDPAD U40.VDD U40.VDDPAD U41.VDD U41.VDDPAD U42.VDD U42.VDDPAD U43.VDD U43.VDDPAD U44.VDD U44.VDDPAD U45.VDD U45.VDDPAD U46.VDD U46.VDDPAD U47.VDD U47.VDDPAD U48.VDD U48.VDDPAD U49.VDD U49.VDDPAD U50.VDD U50.VDDPAD U51.VDD U51.VDDPAD U52.VDD U52.VDDPAD U53.VDD U53.VDDPAD U54.VDD U54.VDDPAD U55.VDD U55.VDDPAD U56.VDD U56.VDDPAD U57.VDD U57.VDDPAD U58.VDD U58.VDDPAD U59.VDD U59.VDDPAD U60.VDD U60.VDDPAD U61.VDD U61.VDDPAD U62.VDD U62.VDDPAD U63.VDD U63.VDDPAD U64.VDD U64.VDDPAD U65.VDD U65.VDDPAD U66.VDD U66.VDDPAD U67.VDD U67.VDDPAD U68.VDD U68.VDDPAD U69.VDD U69.VDDPAD U70.VDD U70.VDDPAD U71.VDD U71.VDDPAD U72.VDD U72.VDDPAD U73.VDD U73.VDDPAD U74.VDD U74.VDDPAD U75.VDD U75.VDDPAD U76.VDD U76.VDDPAD U77.VDD U77.VDDPAD U78.VDD U78.VDDPAD U79.VDD U79.VDDPAD U80.VDD U80.VDDPAD U81.VDD U81.VDDPAD U82.VDD U82.VDDPAD U83.VDD U83.VDDPAD U84.VDD U84.VDDPAD U85.VDD U85.VDDPAD U86.VDD U86.VDDPAD U87.VDD U87.VDDPAD U88.VDD U88.VDDPAD U89.VDD U89.VDDPAD U90.VDD U90.VDDPAD U91.VDD U91.VDDPAD U92.VDD U92.VDDPAD U93.VDD U93.VDDPAD U94.VDD U94.VDDPAD U95.VDD U95.VDDPAD U96.VDD U96.VDDPAD U97.VDD U97.VDDPAD U98.VDD U98.VDDPAD U99.VDD U99.VDDPAD U100.VDD U100.VDDPAD U101.VDD U101.VDDPAD U102.VDD U102.VDDPAD U103.VDD U103.VDDPAD U104.VDD U104.VDDPAD U105.VDD U105.VDDPAD U106.VDD U106.VDDPAD U107.VDD U107.VDDPAD U108.VDD U108.VDDPAD U109.VDD U109.VDDPAD U110.VDD U110.VDDPAD U111.VDD U111.VDDPAD U112.VDD U112.VDDPAD U113.VDD U113.VDDPAD U114.VDD U114.VDDPAD U115.VDD U115.VDDPAD U116.VDD U116.VDDPAD U117.VDD U117.VDDPAD U118.VDD U118.VDDPAD U119.VDD U119.VDDPAD U120.VDD U120.VDDPAD U121.VDD U121.VDDPAD U122.VDD U122.VDDPAD U123.VDD U123.VDDPAD U124.VDD U124.VDDPAD U125.VDD U125.VDDPAD U126.VDD U126.VDDPAD U127.VDD U127.VDDPAD U128.VDD U128.VDDPAD U129.VDD U129.VDDPAD U130.VDD U130.VDDPAD U131.VDD U131.VDDPAD U132.VDD U132.VDDPAD U133.VDD U133.VDDPAD U134.VDD U134.VDDPAD U135.VDD U135.VDDPAD U136.VDD U136.VDDPAD U137.VDD U137.VDDPAD U138.VDD U138.VDDPAD U139.VDD U139.VDDPAD U140.VDD U140.VDDPAD U141.VDD U141.VDDPAD U142.VDD U142.VDDPAD U143.VDD U143.VDDPAD U144.VDD U144.VDDPAD U145.VDD U145.VDDPAD U146.VDD U146.VDDPAD U147.VDD U147.VDDPAD U148.VDD U148.VDDPAD U149.VDD U149.VDDPAD U150.VDD U150.VDDPAD U151.VDD U151.VDDPAD U152.VDD U152.VDDPAD U153.VDD U153.VDDPAD U154.VDD U154.VDDPAD U155.VDD U155.VDDPAD U156.VDD U156.VDDPAD U157.VDD U157.VDDPAD U158.VDD U158.VDDPAD U159.VDD U159.VDDPAD U160.VDD U160.VDDPAD U161.VDD U161.VDDPAD U162.VDD U162.VDDPAD U163.VDD U163.VDDPAD U164.VDD U164.VDDPAD U165.VDD U165.VDDPAD U166.VDD U166.VDDPAD U167.VDD U167.VDDPAD U168.VDD U168.VDDPAD U169.VDD U169.VDDPAD U170.VDD U170.VDDPAD U171.VDD U171.VDDPAD U172.VDD U172.VDDPAD U173.VDD U173.VDDPAD U174.VDD U174.VDDPAD U175.VDD U175.VDDPAD U176.VDD U176.VDDPAD U177.VDD U177.VDDPAD U178.VDD U178.VDDPAD U179.VDD U179.VDDPAD U180.VDD U180.VDDPAD U181.VDD U181.VDDPAD U182.VDD U182.VDDPAD U183.VDD U183.VDDPAD U184.VDD U184.VDDPAD U185.VDD U185.VDDPAD U186.VDD U186.VDDPAD U187.VDD U187.VDDPAD U188.VDD U188.VDDPAD U189.VDD U189.VDDPAD U190.VDD U190.VDDPAD U191.VDD U191.VDDPAD U192.VDD U192.VDDPAD U193.VDD U193.VDDPAD U194.VDD U194.VDDPAD U195.VDD U195.VDDPAD U196.VDD U196.VDDPAD U197.VDD U197.VDDPAD U198.VDD U198.VDDPAD U199.VDD U199.VDDPAD U200.VDD U200.VDDPAD U201.VDD U201.VDDPAD U202.VDD U202.VDDPAD U203.VDD U203.VDDPAD U204.VDD U204.VDDPAD U205.VDD U205.VDDPAD U206.VDD U206.VDDPAD U207.VDD U207.VDDPAD U208.VDD U208.VDDPAD U209.VDD U209.VDDPAD U210.VDD U210.VDDPAD U211.VDD U211.VDDPAD U212.VDD U212.VDDPAD U213.VDD U213.VDDPAD U214.VDD U214.VDDPAD U215.VDD U215.VDDPAD U216.VDD U216.VDDPAD U217.VDD U217.VDDPAD U218.VDD U218.VDDPAD U219.VDD U219.VDDPAD U220.VDD U220.VDDPAD U221.VDD U221.VDDPAD U222.VDD U222.VDDPAD U223.VDD U223.VDDPAD U224.VDD U224.VDDPAD U225.VDD U225.VDDPAD U226.VDD U226.VDDPAD U227.VDD U227.VDDPAD U228.VDD U228.VDDPAD U229.VDD U229.VDDPAD U230.VDD U230.VDDPAD U231.VDD U231.VDDPAD U232.VDD U232.VDDPAD U233.VDD U233.VDDPAD U234.VDD U234.VDDPAD U235.VDD U235.VDDPAD U236.VDD U236.VDDPAD U237.VDD U237.VDDPAD U238.VDD U238.VDDPAD U239.VDD U239.VDDPAD U240.VDD U240.VDDPAD U241.VDD U241.VDDPAD U242.VDD U242.VDDPAD U243.VDD U243.VDDPAD U244.VDD U244.VDDPAD U245.VDD U245.VDDPAD U246.VDD U246.VDDPAD U247.VDD U247.VDDPAD U248.VDD U248.VDDPAD U249.VDD U249.VDDPAD U250.VDD U250.VDDPAD U251.VDD U251.VDDPAD U252.VDD U252.VDDPAD